# Altium PCB LS1.PcbDoc
Units mil, origin at the board's own origin, x right, y up, seen from the top; angles counter-clockwise.
Board outline 3000 x 3550 mil, 4 copper layers (Top Layer, Internal Plane 1, Internal Plane 2, Bottom Layer), stack 30.634 mil thick; 89 components, 61 nets, 367 pads, 57 vias.
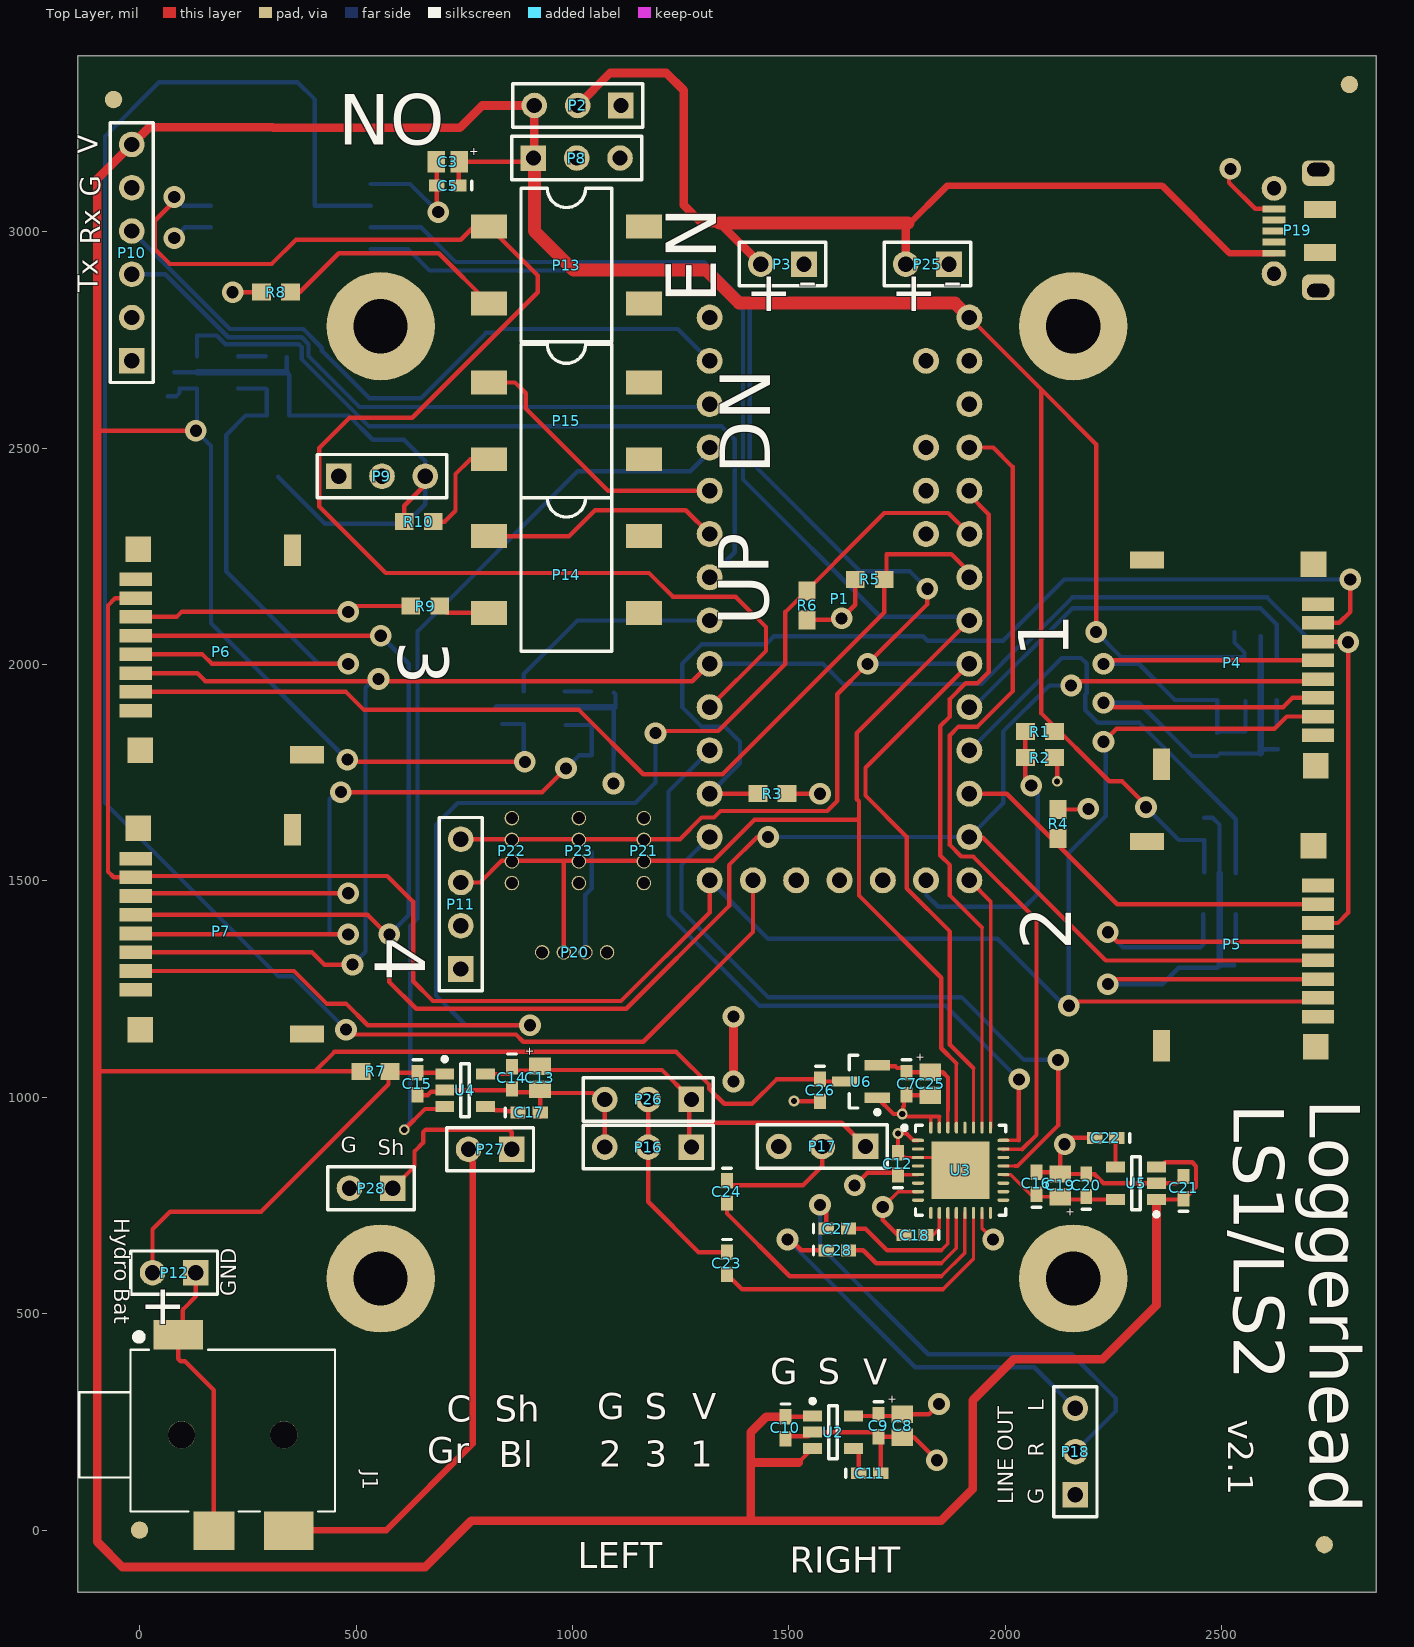
[diagram p0: Top Layer view]
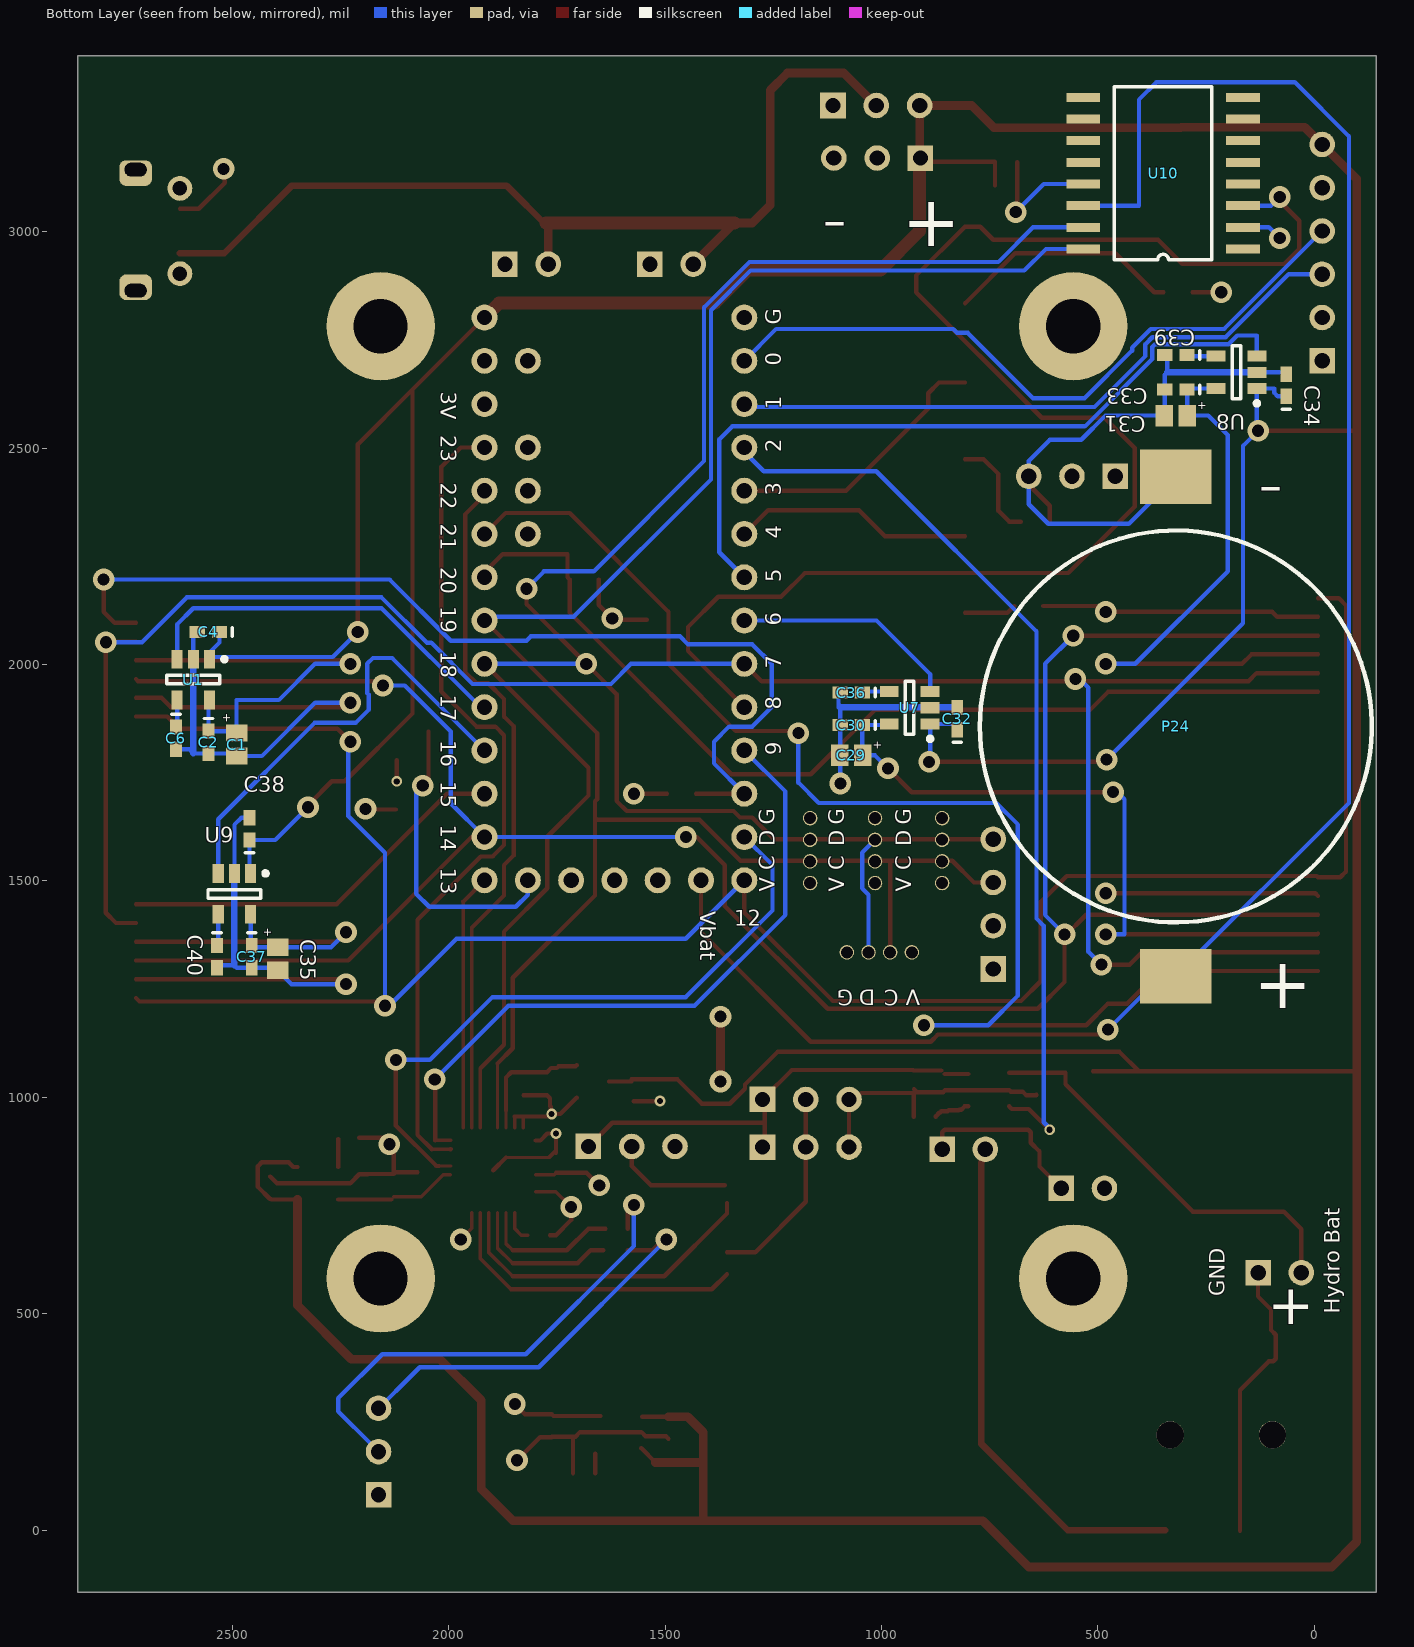
[diagram p1: Bottom Layer view, seen from below]
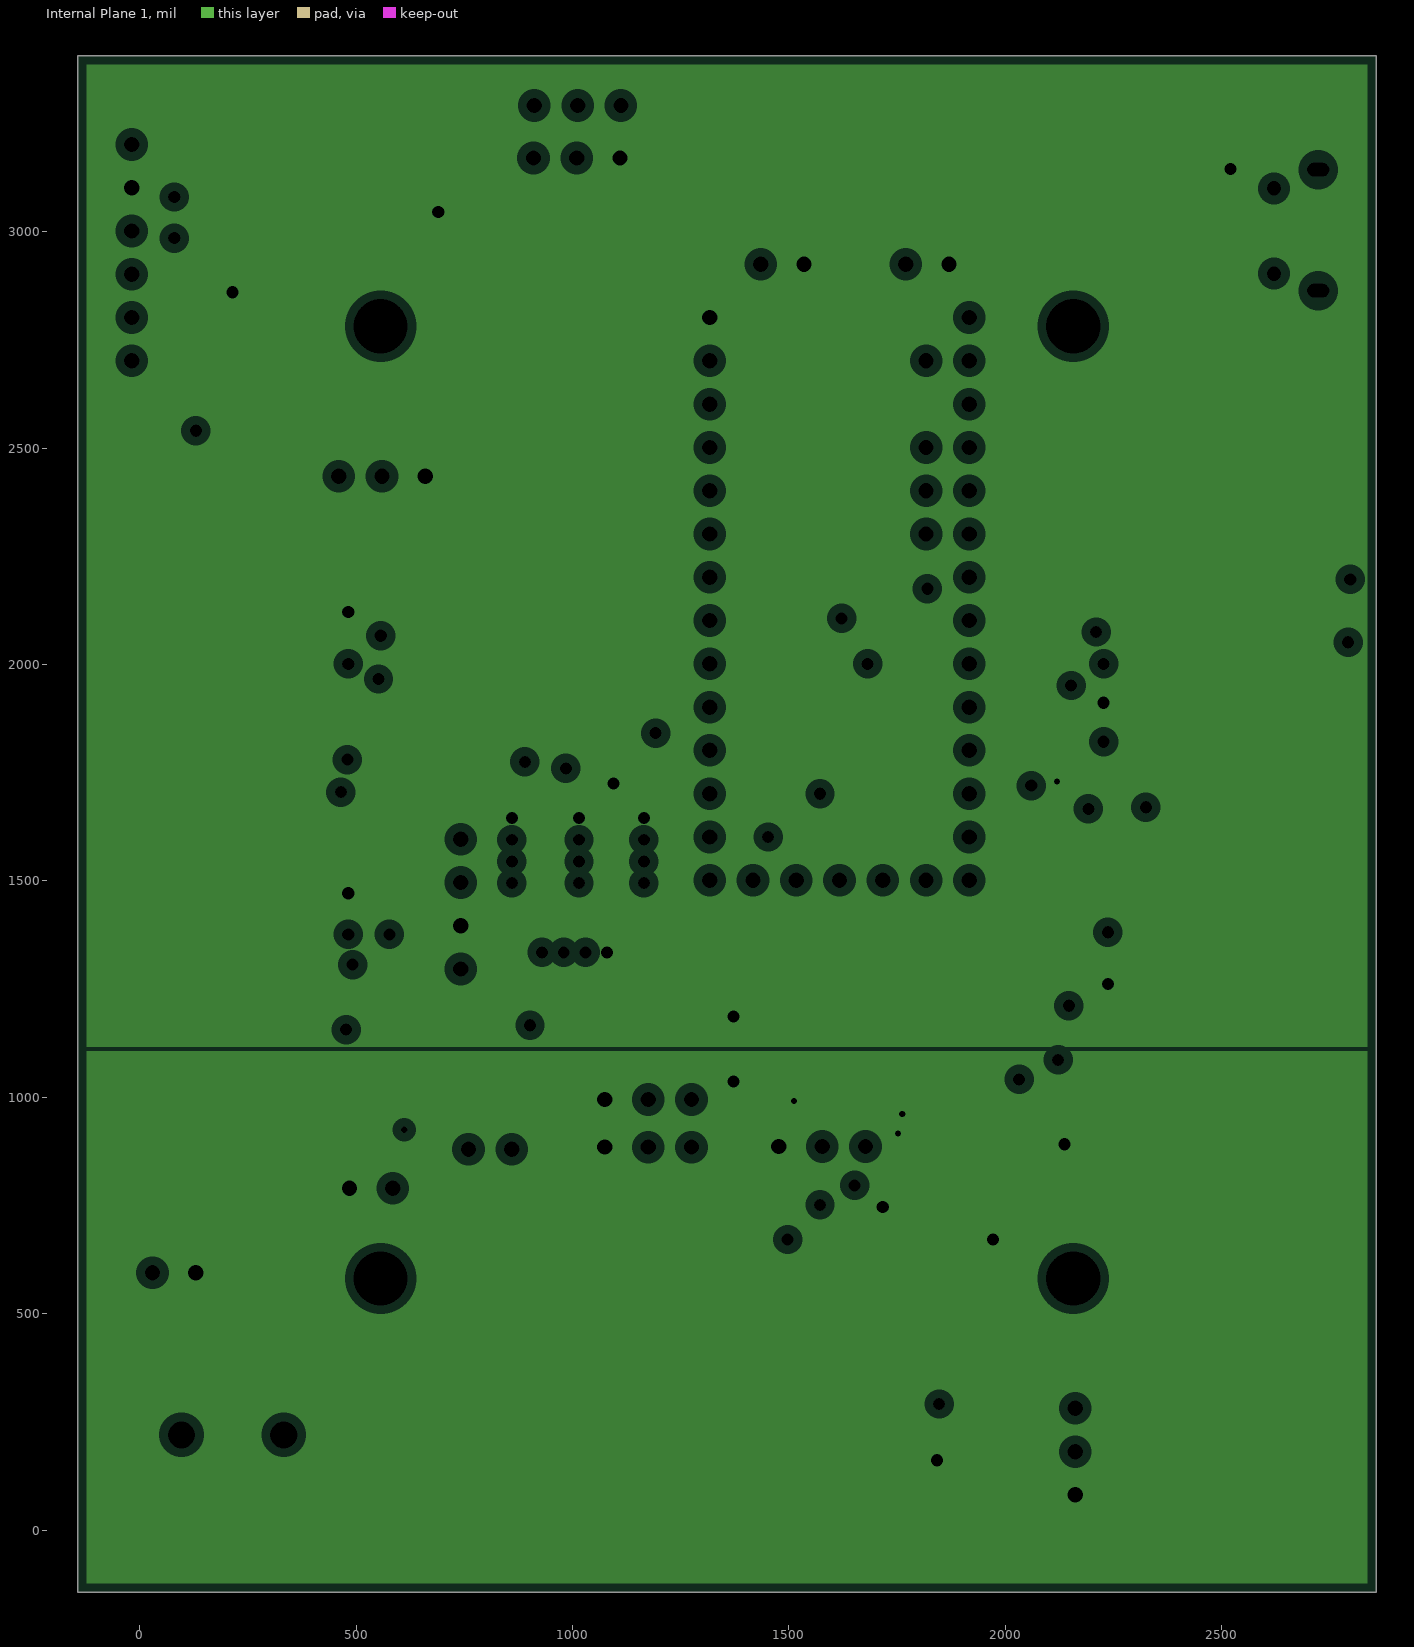
[diagram p2: Internal Plane 1, clearances drawn from the general rule]
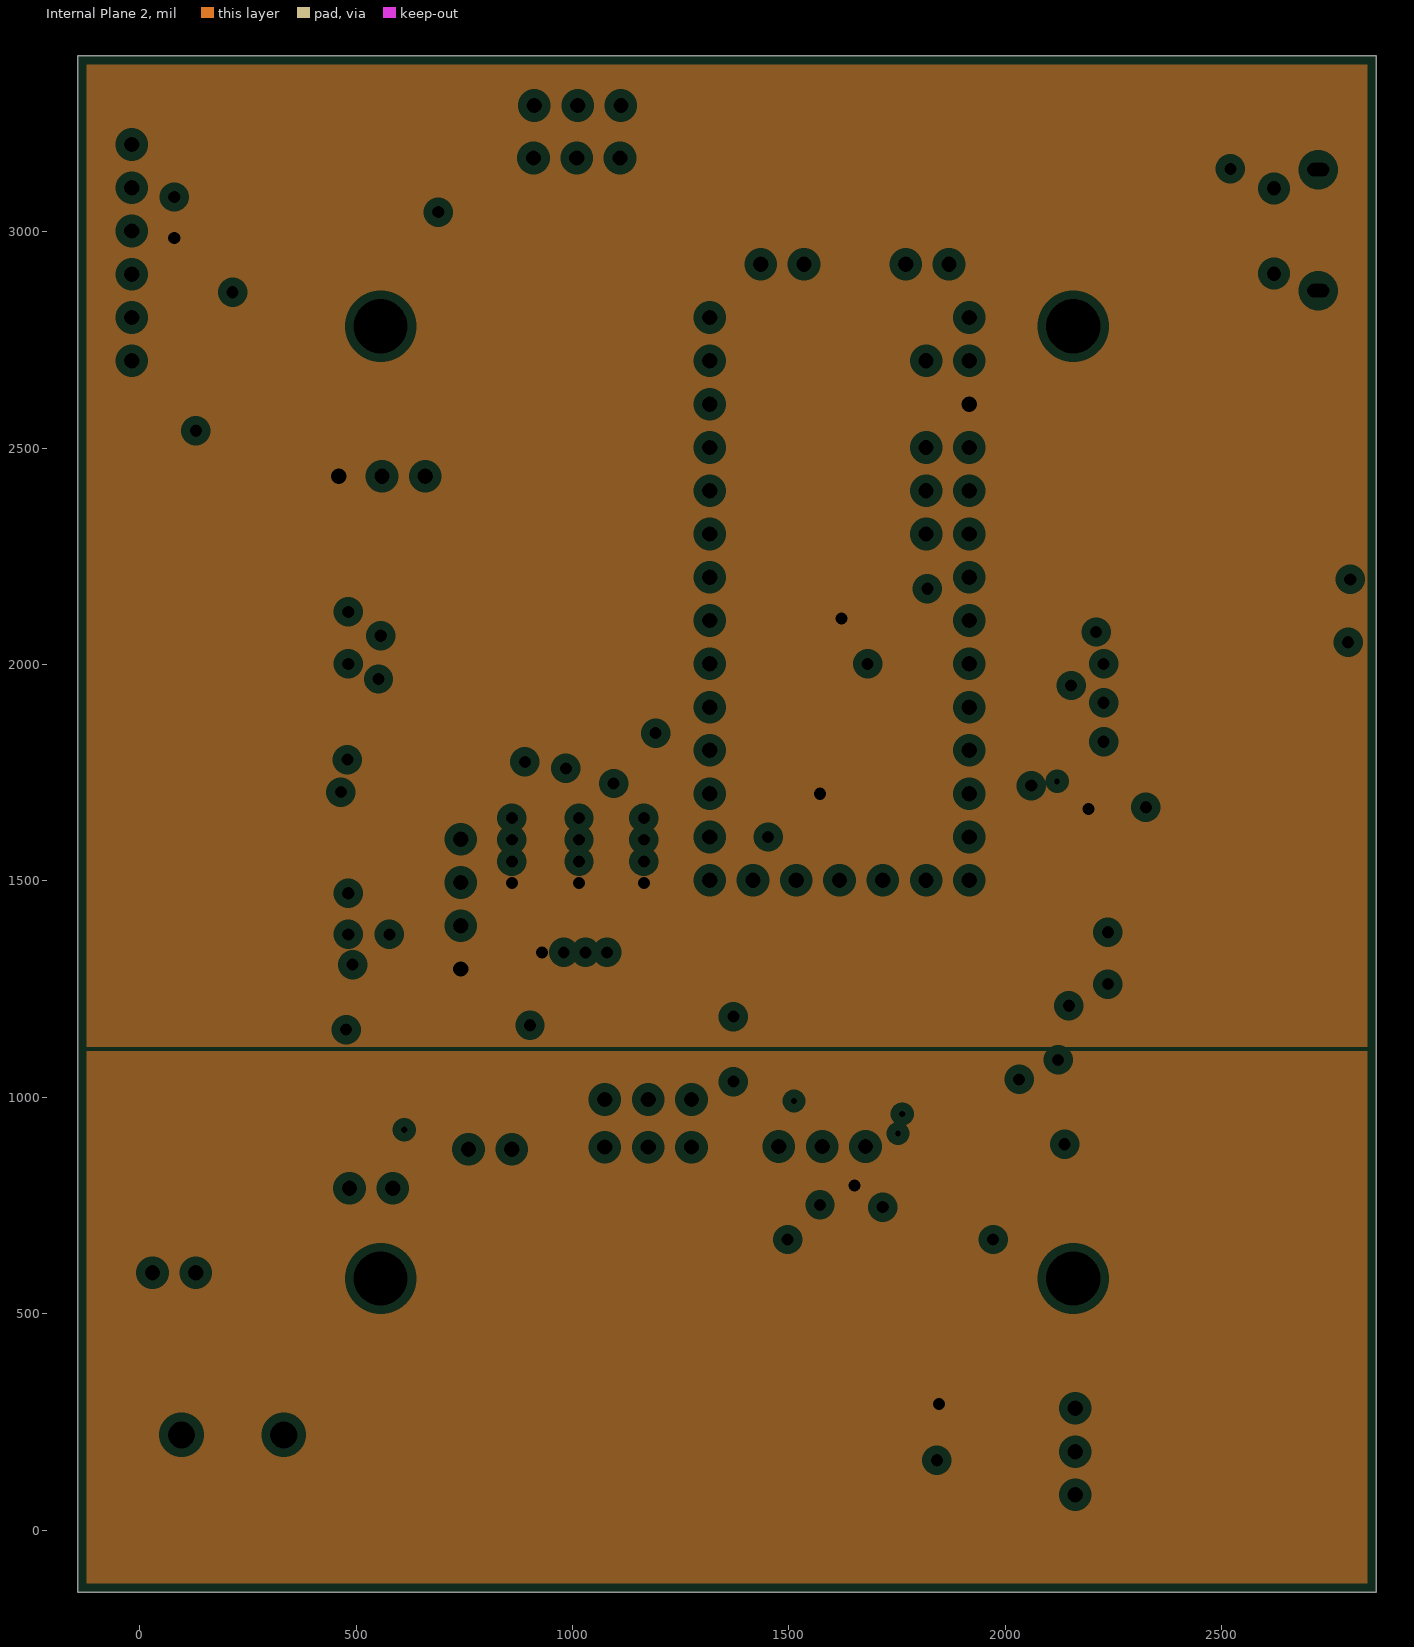
[diagram p3: Internal Plane 2, clearances drawn from the general rule]

## Layer stack, top to bottom
Top Solder: solder mask 0.4, Solder Resist, Dk 3.5
Top Layer: signal copper 1.4
Dielectric 1: core 10, FR-4, Dk 4.2
Internal Plane 1: plane copper 1.417, net (Multiple Nets)
Dielectric 3: prepreg 5, Dk 4.2
Internal Plane 2: plane copper 1.417, net (Multiple Nets)
Dielectric 2: core 10, Dk 4.2
Bottom Layer: signal copper 1.4
Bottom Solder: solder mask 0.4, Solder Resist, Dk 3.5

## Board outline
-142.95,-143.58 -142.95,3406.42 2857.05,3406.42 2857.05,-143.58

## Design rules (kind name [scope] priority, off if disabled: settings)
Clearance [All] p1: gap=6 ignorepadtopadclearanceinfootprint=FALSE except(0: Arc-Hole Track-Hole SMDPad-Hole THPad-Hole Via-Hole Fill-Hole Poly-Hole Region-Hole Text-Hole)
PlaneClearance [All] p1: clearance=20
PlaneConnect [All] p1: planeconnectstyle=Relief reliefexpansion=20 reliefentries=4 reliefconductorwidth=10 reliefairgap=10
PolygonConnect [All] p1: connectstyle=Relief reliefconductorwidth=10 reliefentries=4 polygonreliefangle="90 Angle" airgapwidth=10
RoutingVias [All] p1: holewidth=28 width=50 viastyle="Through Hole" minholewidth=28 minwidth=50 maxholewidth=28 maxwidth=50
SolderMaskExpansion [All] p1: expansion=4 istentingtop=FALSE
Width [All] p1: maxlimit=100 minlimit=6 preferedwidth=10
28 further rules are at their usual default settings.

## Classes and differential pairs
component class LS1: C1 C2 C3 C4 C5 C6 C29 C30 C31 C32 C33 C34 C35 C36 C37 C38 C39 C40 P1 P2 P3 P4 P5 P6 P7 P8 P9 P10 P11 P13 P14 P15 P19 P20 P21 P22 P23 P24 P25 R1 R2 R3 R4 R5 R6 R8 R9 R10 U1 U7 U8 U9 U10
component class LS1_audio: C7 C8 C9 C10 C11 C12 C13 C14 C15 C16 C17 C18 C19 C20 C21 C22 C23 C24 C25 C26 C27 C28 J1 P12 P16 P17 P18 P26 P27 P28 R7 U2 U3 U4 U5 U6

## Components (designator, comment, footprint, x,y, rotation, side; value= is the part's Value field where it differs from the comment)
C1 "10uF" Tant0805 2490,1815 r90 bottom
C2 "0.1uF" 0402 2555,1820 r270 bottom
C3 "10uF" Tant0805 712.05,3161.42 r0 top
C4 "1uF" 0402 2555,2075 r0 bottom value=0.1uF
C5 "0.1uF" 0402 712.05,3106.42 r180 top
C6 "0.01uF" 0402 2630,1830 r270 bottom value=0.1uF
C7 "0.1uF" 0402 1772.05,1031.42 r270 top
C8 "10uF" Tant0805 1762.05,241.42 r90 top
C9 "0.1uF" 0402 1707.05,241.42 r270 top
C10 "1uF" 0402 1492.05,236.42 r270 top value=0.1uF
C11 "0.01uF" 0402 1687.05,131.42 r0 top value=0.1uF
C12 "0.1uF" 0402 1752.05,846.42 r90 top
C13 "10uF" Tant0805 925,1045 r90 top
C14 "0.1uF" 0402 860,1045 r270 top
C15 "1uF" 0402 642.05,1031.42 r270 top value=0.1uF
C16 "0.1uF" 0402 2072.05,801.42 r90 top
C17 "0.01uF" 0402 900,965 r0 top value=0.1uF
C18 "0.1uF" 0402 1791.46,681.42 r180 top
C19 "10uF" Tant0805 2127.05,796.42 r270 top
C20 "0.1uF" 0402 2187.05,796.42 r90 top
C21 "1uF" 0402 2412.05,791.42 r90 top value=0.1uF
C22 "0.01uF" 0402 2232.05,906.42 r180 top value=0.1uF
C23 "1.0uF" 0402 1357.05,616.42 r270 top value=0.1uF
C24 "1.0uF" 0402 1357.05,781.42 r270 top value=0.1uF
C25 "10uF" Tant0805 1827.05,1031.42 r90 top
C26 "1uF" 0402 1572.05,1016.42 r270 top value=0.1uF
C27 "1.0uF" 0402 1612.05,696.42 r0 top value=0.1uF
C28 "1.0uF" 0402 1612.05,646.42 r0 top value=0.1uF
C29 "10uF" Tant0805 1070,1790 r180 bottom
C30 "0.1uF" 0402 1070,1860 r0 bottom
C31 "10uF" Tant0805 320,2575 r180 bottom
C32 "1uF" 0402 825,1875 r90 bottom value=0.1uF
C33 "0.1uF" 0402 320,2635 r0 bottom
C34 "1uF" 0402 65,2645 r90 bottom value=0.1uF
C35 "10uF" Tant0805 2395,1320 r90 bottom
C36 "0.01uF" 0402 1070,1935 r0 bottom value=0.1uF
C37 "0.1uF" 0402 2455,1325 r270 bottom
C38 "1uF" 0402 2460,1620 r90 bottom value=0.1uF
C39 "0.01uF" 0402 320,2715 r0 bottom value=0.1uF
C40 "0.01uF" 0402 2535,1325 r270 bottom value=0.1uF
J1 "MJ1-3510-SMT" CUI_MJ1-3510-SMT 215,220 r0 top
P1 "Teensy3.x" Teensy3.x 1817.05,2701.42 r180 top
P2 "switch" HDR1X3 1112.05,3291.42 r180 top
P3 "Header 2" HDR1X2 1535,2925 r180 top
P4 "microSD Hirose" "DM3D microSD" 2597.05,2076.42 r180 top
P5 "microSD Hirose" "DM3D microSD" 2597.05,1426.42 r180 top
P6 "microSD Hirose" "DM3D microSD" 117.05,1956.42 r0 top
P7 "microSD Hirose" "DM3D microSD" 117.05,1311.42 r0 top
P8 "BIG CAP 1000 uF" HDR1X3 910,3170 r0 top
P9 "BIG CAP 1000 uF" HDR1X3 460,2435 r0 top
P10 "Header 6" HDR1X6 -17.95,2701.42 r90 top
P11 "Header 4" HDR1X4 742.05,1296.42 r90 top
P12 "Header 2" HDR1X2 130,595 r180 top
P13 "pushbutton" SOP4 807.05,3011.42 r0 top
P14 "pushbutton" SOP4 807.05,2296.42 r0 top
P15 "pushbutton" SOP4 807.05,2651.42 r0 top
P16 "HYDROPHONE" HDR1X3 1275,885 r180 top
P17 "HYDROPHONE" HDR1X3 1677.05,886.42 r180 top
P18 "Header 3" HDR1X3 2162,81.42 r90 top
P19 "microUSB" microUSB-B 2672.05,3001.42 r90 top
P20 "1x4 1.27mm" "Header1x4 1.27mm" 930,1335 r0 top
P21 "1x4 1.27mm" "Header1x4 1.27mm" 1165,1495 r90 top
P22 "1x4 1.27mm" "Header1x4 1.27mm" 860,1495 r90 top
P23 "1x4 1.27mm" "Header1x4 1.27mm" 1015,1495 r90 top
P24 "CoinCellHolder" CoinCellHolder 320,1280 r90 bottom
P25 "Header 2" HDR1X2 1870,2925 r180 top
P26 "HYDROPHONE_MON" HDR1X3 1275,995 r180 top
P27 "Header 2" HDR1X2 860,880 r180 top
P28 "Header 2" HDR1X2 585,790 r180 top
R1 "100k" 3-0603 2080,1845 r0 top
R2 "100k" 3-0603 2080,1785 r180 top
R3 "10k" 3-0603 1462.05,1701.42 r180 top
R4 "10k" 3-0603 2122.05,1631.42 r270 top
R5 "10k" 3-0603 1687.05,2196.42 r0 top
R6 "10k" 3-0603 1542.05,2136.42 r90 top
R7 "0X" 3-0603 545,1060 r0 top
R8 "10k" 3-0603 315,2860 r180 top
R9 "10k" 3-0603 660,2135 r180 top
R10 "10k" 3-0603 645,2330 r180 top
U1 "LP3985IM5-3.3" MF05A_N 2590,1965 r270 bottom
U2 "LP3985IM5-3.3" MF05A_N 1602.05,226.42 r0 top
U3 "SGTL5000" QFN32 1897.05,831.42 r0 top
U4 "LP3985IM5-3.3" MF05A_N 752.05,1016.42 r0 top
U5 "LP3985IM5-3.3" MF05A_N 2302.05,801.42 r180 top
U6 "MCP1700T-1802E/TT" SOT-23-TT3_N 1667.05,1036.42 r180 top
U7 "LP3985IM5-3.3" MF05A_N 935,1900 r0 bottom
U8 "LP3985IM5-3.3" MF05A_N 180,2675 r0 bottom
U9 "LP3985IM5-3.3" MF05A_N 2495,1470 r270 bottom
U10 "DS3231" DS3231 165,2960 r0 bottom

## Footprints (in the part's own frame and the unit in brackets; to place one, negate y for a bottom-side part, rotate by r counter-clockwise, add the part's x,y. Pads: shape width x height; smd on the part's side, far side on the other; paste and mask are expansions set on the pad)
3-0603 [mm] "Chip Resistor; Body 1.6 x 0.9 mm (LxW typ)"
  rect 1.1x1 smd: 1(-0.85,0) 2(0.85,0)
0402 [mm] "Chip Capacitor; Body 1.0 x 0.5 mm (LxW typ)"
  rect 0.9x0.7 smd: 1(-0.65,0) 2(0.65,0)
  silkscreen extent -1.4,-0.25 -1.4,0.25
CoinCellHolder [mm] "MPD BU2032SM-BT-GTR"
  rect 3.2x4.2 smd: 1(0,0) 2(29.3,0)
  silkscreen extent 3.15,-11.5 26.15,11.5
CUI_MJ1-3510-SMT [mm]
  rect 2.9x1.75 smd: 1(-3.2,5.875)
  rect 2.9x2.25 smd: 2(3.3,-5.625)
  rect 2.4x2.25 smd: 3(-1.1,-5.625)
  round 1.6 hole 1.6 unplated: ""(-3,0) ""(3,0)
  silkscreen extent -9,-4.5 6,5.95
"DM3D microSD" [mm] "MICROSD_HIROSE Push-Pull"
  rect 1.5x1.5 smd: 0(-3.048,7.874) 0(-2.921,-3.937)
  rect 1x1.85 smd: 0(6,7.8)
  rect 2x1 smd: 0(6.85,-4.191)
  rect 1.9x0.8 smd: 1(-3.188,-1.601) 2(-3.188,-0.501) 3(-3.188,0.599) 4(-3.188,1.699) 5(-3.188,2.799) 6(-3.188,3.899) 7(-3.188,4.999) 8(-3.188,6.099)
  body extent -3.65,-4.45 7.8,7.5, height 1.55
DS3231 [mm]
  rect 1.98x0.53 smd: 1(0,0) 2(0,-1.27) 3(0,-2.54) 4(0,-3.81) 5(0,-5.08) 6(0,-6.35) 7(0,-7.62) 8(0,-8.89) 9(9.37,-8.89) 10(9.37,-7.62) 11(9.37,-6.35) 12(9.37,-5.08) 13(9.37,-3.81) 14(9.37,-2.54) 15(9.37,-1.27) 16(9.37,0)
  silkscreen extent 1.83,-9.53 7.54,0.64
HDR1X2 [mm] "Connector; Header; 2 Position"
  rect 1.5x1.5 hole 0.9: 1(0,0)
  round 1.5 hole 0.9: 2(2.54,0)
  silkscreen extent -1.27,-1.27 3.81,1.27
HDR1X3 [mm] "Connector; Header; 3 Position"
  rect 1.5x1.5 hole 0.9: 1(0,0)
  round 1.5 hole 0.9: 2(2.54,0) 3(5.08,0)
  silkscreen extent -1.27,-1.27 6.35,1.27
HDR1X4 [mm] "Connector; Header; 4 Position"
  rect 1.5x1.5 hole 0.9: 1(0,0)
  round 1.5 hole 0.9: 2(2.54,0) 3(5.08,0) 4(7.62,0)
  silkscreen extent -1.27,-1.27 8.89,1.27
HDR1X6 [mm] "Connector; Header; 6 Position"
  rect 1.5x1.5 hole 0.9: 1(0,0)
  round 1.5 hole 0.9: 2(2.54,0) 3(5.08,0) 4(7.62,0) 5(10.16,0) 6(12.7,0)
  silkscreen extent -1.27,-1.27 13.97,1.27
"Header1x4 1.27mm" [mm]
  round 0.85 hole 0.7: 1(0,0) 2(1.27,0) 3(2.54,0) 4(3.81,0)
MF05A_N [mm] "SOT23, 5-Leads, Body 2.9x1.6mm, Pitch 0.95mm, Lead Span 2.8mm, IPC Medium Density"
  rect 1.1x0.65 smd: 1(-1.2,0.95) 2(-1.2,0) 3(-1.2,-0.95) 4(1.2,-0.95) 5(1.2,0.95)
  silkscreen extent -1.32,-1.55 0.25,1.95, body extent -0.9,-1.55 0.9,1.55, height 1.19
microUSB-B [mm]
  rect 0.4x1.35 smd: 1(-1.3,1.3) 2(-0.65,1.3) 3(0,1.3) 4(0.65,1.3) 5(1.3,1.3)
  rrect50% 1.5x1.9 hole 0.8 slot 1.3 at 90 deg copper offset 0.2,0: ""(-3.5,-1.3)
  round 1.45 hole 0.85: ""(-2.5,1.3) ""(2.5,1.3)
  rect 1x1.9 smd: ""(-1.25,-1.4) ""(1.25,-1.4)
  rrect50% 1.5x1.9 hole 0.8 slot 1.3 at 90 deg copper offset -0.2,0: ""(3.6,-1.3)
  body extent -4.1,-4.07 4.1,1.36, height 2.68
QFN32 [mm]
  oval 0.7x0.2 smd: 1(-2.5,1.75) 2(-2.5,1.25) 3(-2.5,0.75) 4(-2.5,0.25) 5(-2.5,-0.25) 6(-2.5,-0.75) 7(-2.5,-1.25) 8(-2.5,-1.75) 17(2.5,-1.75) 18(2.5,-1.25) 19(2.5,-0.75) 20(2.5,-0.25) 21(2.5,0.25) 22(2.5,0.75) 23(2.5,1.25) 24(2.5,1.75)
  oval 0.2x0.7 smd: 9(-1.75,-2.5) 10(-1.25,-2.5) 11(-0.75,-2.5) 12(-0.25,-2.5) 13(0.25,-2.5) 14(0.75,-2.5) 15(1.25,-2.5) 16(1.75,-2.5) 25(1.75,2.5) 26(1.25,2.5) 27(0.75,2.5) 28(0.25,2.5) 29(-0.25,2.5) 30(-0.75,2.5) 31(-1.25,2.5) 32(-1.75,2.5)
  rect 3.4x3.4 smd paste-1.2: 33(0,0)
  silkscreen extent -3.42,-2.65 2.65,2.65, body extent -2.5,-2.5 2.5,2.5, height 1
SOP4 [mm]
  rect 2.1x1.4 smd: 1(0,0) 2(0,-4.5) 3(9.1,-4.5) 4(9.1,0)
  silkscreen extent 1.89,-6.75 7.21,2.25
SOT-23-TT3_N [mm] "SOT23, 3-Leads, Body 2.9x1.3mm, Pitch 0.95mm, Lead Span 2.4mm, IPC Medium Density"
  rect 1.5x0.6 smd: 1(-0.95,0.95) 2(-0.95,-0.95) 3(0.95,0)
  silkscreen extent -1.07,-1.55 0.7,1.92, body extent -0.7,-1.52 0.7,1.53, height 1.12
Tant0805 [mil]
  rect 40x50 smd: 1(-26.5,0) 2(26.5,0)
Teensy3.x [mil]
  round 60 hole 35.43: 0(500,0) 1(500,100) 2(500,200) 3(500,300) 3.3V(-100,100) 3.3V2(300,1200) 4(500,400) 5(500,500) 6(500,600) 7(500,700) 8(500,800) 9(500,900) 10(500,1000) 11(500,1100) 12(500,1200) 13(-100,1200) 14(-100,1100) 15(-100,1000) 16(-100,900) 17(-100,800) 18(-100,700) 19(-100,600) 20(-100,500) 21(-100,400) 22(-100,300) 23(-100,200) A10(0,300) A11(0,400) A14(0,1200) AGND(-100,0) AREF(0,200) GND(500,-100) GND2(200,1200) PGM(100,1200) VBat(400,1200) Vin(-100,-100) VUSB(0,0)

## Part data
C1 C3 C8 C13 C19 C25 C29 C31 C35: library part Tant0805
C2 C4 C5 C6 C7 C9 C10 C11 C12 C14 C15 C16 C17 C18 C20 C21 C22 C23 C24 C26 C27 C28 C30 C32 C33 C34 C36 C37 C38 C39 C40: library part C0402, "Ceramic Chip Capacitor - Standard", PackageDocument=Mar-2001, Code_IPC="1005 [0402]", Code_JEITA=0402, ComponentLink1Description="Manufacturer Link", ComponentLink1URL=http://www.kemet.com/, ComponentLink2Description=Datasheet, ComponentLink2URL=http://www.kemet.com/kemet/web/homepage/kechome.nsf/vapubfilesname/F3102TA.pdf/$file/F3102TA.pdf, DatasheetDocument=Mar-2001, LatestRevisionDate=19-Mar-2004, LatestRevisionNote="Silkscreen size reduced.", Note="Footprint corresponds to dimensions for bulk cassette packaging. This case size has tightened tolerances.", PackageReference=0402, Published=17-Jul-2002, Publisher="Altium Limited"
J1: "3.5 mm, Mono, Right Angle, Surface Mount (SMT), Audio Jack Connector", Package=None, Availability=Unavailable, MF="{'manufacturer': u'CUI'}", MP=MJ1-3510-SMT, Price=None
P2 P8 P9 P16 P17 P26: library part "Header 3", "Header, 3-Pin", LatestRevisionDate=17-Jul-2002, LatestRevisionNote="Re-released for DXP Platform.", Publisher="Altium Limited"
P3 P12 P25 P27 P28: "Header, 2-Pin", LatestRevisionDate=17-Jul-2002, LatestRevisionNote="Re-released for DXP Platform.", Publisher="Altium Limited"
P4 P5 P6 P7: Supplier Part Number 1=HR1941DKR-ND, Supplier 1=Digi-Key
P10: "Header, 6-Pin", LatestRevisionDate=17-Jul-2002, LatestRevisionNote="Re-released for DXP Platform.", Publisher="Altium Limited"
P11: "Header, 4-Pin", LatestRevisionDate=17-Jul-2002, LatestRevisionNote="Re-released for DXP Platform.", Publisher="Altium Limited"
P13 P14 P15: Supplier Part Number 1=450-1757-2-ND, Supplier 1=Digi-Key
P18: "Header, 3-Pin", LatestRevisionDate=17-Jul-2002, LatestRevisionNote="Re-released for DXP Platform.", Publisher="Altium Limited"
P19: library part microUSB-B, Supplier Part Number 1=WM1399TR-ND, Supplier 1=Digi-Key
P20 P21 P22 P23: library part "Header 1x4 1.27mm"
P24: Supplier Part Number 1=BU2032SM-BT-GCT-ND, Supplier 1=Digi-Key
R1 R2 R3 R4 R5 R6 R7 R8 R9 R10: library part ERJ3RK, "Precision Thick Film Chip Resistor, 10 Ohm to 1M Ohm Range, 1% and 0.5% Tolerance, 0603 Size, 0.063 W", PackageDocument=Mar-2003, Code_IPC="1608 [0603]", ComponentLink1Description="Manufacturer Link", ComponentLink1URL=http://www.panasonic.com/industrial/components/resistive_products.htm, ComponentLink2Description=Datasheet, ComponentLink2URL=http://www.panasonic.com/industrial/components/pdf/AOA0000CE2.pdf, LatestRevisionDate=19-Mar-2004, LatestRevisionNote="Silkscreen size reduced.", PackageReference=3-0603, Published=17-Dec-2003, Publisher="Altium Limited"
U1 U2 U4 U5 U7 U8 U9: "Micropower, 150mA Low-Noise Ultra Low-Dropout CMOS Voltage Regulator", DigiKeyPartNumber=LP3985IM5-3.3CT-ND, Manufacturer="National Semiconductor", PackageTopMarking=LDQB*XTT, PowerWise=N, ComponentLink1Description="LP3985 Datasheet", ComponentLink1URL=http://www.national.com/ds/LP/LP3985.pdf, ComponentLink2Description="LP3985 Web Page", ComponentLink2URL=http://www.national.com/pf/LP/LP3985.html, ComponentLink3Description="MF05A Package Page", ComponentLink3URL=http://www.national.com/packaging/folders/mf05a.html, CompType="LDO IC", DatasheetVersion=Aug-2005, PackageDescription="Molded SOT-23, .115 x .063 x .040 in Body, 5 Lead, .0375 in Pitch", PackageReference=MF05A, PackageVersion="revD, Aug-2008", PartNumber=LP3985IM5-3.3, PinCount=5, Published=4-Dec-2008, Publisher="Altium Limited", RoHS=O
U6: "Low Quiescent Current LDO, 3-Pin SOT-23, Extended Temperature, Tape and Reel", Manufacturer=Microchip, Supplier Part Number 1=MCP1700T1802ETTTR-ND, Code_IPC=SOT23-3, ComponentLink1Description="Manufacturer URL", ComponentLink1URL=http://www.microchip.com/, ComponentLink2Description=Datasheet, ComponentLink2URL=http://ww1.microchip.com/downloads/en/DeviceDoc/21826b.pdf, ComponentLink3Description="Package Specification", ComponentLink3URL=http://www.microchip.com/stellent/groups/techpub_sg/documents/packagingspec/en012702.pdf, DatasheetVersion="revB, Feb-2007", Mounting Technology="Surface Mount", PackageDescription="3-Lead Plastic Small Outline Transistor (TT) [SOT-23]", PackageReference=SOT-23-TT3, PackageVersion="revBB, Aug-2009", PartNumber=MCP1700T-1802E/TT, Supplier 1=Digi-Key, Supplier 2=Digi-Key, Supplier 3=Digi-Key, Supplier 4=Farnell, Supplier 5=Farnell, Supplier 6=Newark, Supplier 7=Mouser, Supplier Part Number 2=MCP1700T1802ETTCT-ND, Supplier Part Number 3=MCP1700T1802ETTDKR-ND, Supplier Part Number 4=1296591RL, Supplier Part Number 5=1296591, Supplier Part Number 6=84R5175, Supplier Part Number 7=579-MCP1700T1802E/TT
U10: Supplier Part Number 1=DS3231S#-ND, Supplier 1=Digi-Key

## Free pads (board coordinates)
  round 40 smd paste-20 mask+5: 0(-60,3305) 0(0,0) 0(2737.05,-33.58) 0(2795,3340)
  round 250 hole 125: 0(557.05,581.42) 0(557.05,2781.42) 0(2157.05,581.42) 0(2157.05,2781.42)

## Via types
v1: diameter 50, hole 28, Top Layer to Bottom Layer, 52 vias
v2: diameter 25, hole 14, Top Layer to Bottom Layer, 5 vias

## Nets (pads, with @x,y where several pads share a name; then routed paths per layer and width w, separated by ;. In a path a pad name is that pad's centre, name@x,y a point inside that pad or via, vN(x,y) a via of type N, cw(c..) or ccw(c..) an arc to the next point about the centre after c; other vN are vias at no path point)
AGND: C7.2 C8.1 C9.2 C10.2 C11.2 C12.2 C13.1 C14.2 C15.2 C16.2 C17.2 C18.2 C19.1 C20.2 C21.2 C22.2 C25.1 C26.2 J1.1 J1.3 P12.1 P16.3 P17.3 P18.1 P26.3 P28.2 U2.2 U3.1 U3.3 U3.7 U3.15 U3.31 U3.32 U3.33 U4.2 U5.2 U6.1 | length 3102.5
  Top Layer w8: v1@1723.27,752.64 1752.83,782.2 U3.7 ; C12.2@1752.05,877.01 1768.11,860.94 U3.3 U3.33@1867.52,860.94 ; U3.32 1828.15,955.31 ; U3.31 1847.83,955.63 ; U3.15 1946.26,697.2 v1(1972.05,671.42)
  Top Layer w10: P12.1@152.32,572.68 P12.1 130,540 100,510 100,462.28 J1.1 89.02,395.86 94.87,390 105,390 171.69,323.31 J1.3 ; C15.2 642.87,1005 665.86,1005 674.01,1013.15 701.53,1013.15 U4.2 853.27,1016.42 857.64,1012.05 918.55,1012.05 C13.1 ; C17.2@925.59,955 C17.2 925.59,1008.46 927.05,1009.92 1046.81,1009.92 1075,981.73 P16.3 ; C10.2 1498.03,216.81 1545.2,216.81 U2.2 1696.46,226.42 C9.2 C8.1@1761.14,215.83 ; v2@1512.64,990.83 C26.2 ; U6.1 1742.05,961.42 v2(1762.05,961.42) 1764.45,963.82 1764.45,977.91 1765.85,979.31 1765.85,997.81 1772.96,1004.92 C25.1 ; C11.2 C9.2@1712.64,210.24 ; v1@1723.27,752.64 v1(1717.05,746.42) 1717.05,716.42 1752.05,681.42 C18.2 ; C12.2 1752.05,877.01 v2(1752.05,916.42) 1772.05,916.42 1788.15,900.31 U3.1 ; C8.1 1788.55,214.92 v1(1842.05,161.42) ; v2@1767.83,955.63 1847.83,955.63 ; U3.33@1867.52,860.94 U3.33 ; C16.2 C19.1@2122.64,827.01 ; v1@2127.05,881.42 C19.1 C20.2@2186.14,822.92 ; v1@2152.05,906.42 C22.2 ; C20.2 2206.46,822.01 2227.05,801.42 U5.2 2396.46,801.42 C21.2
  other v1: 2137.05,891.42 1372.05,1036.42
  other v2: 1512.05,991.42
BATT_BACK: P1.VBat P24.1 U10.14 | length 4408.7
  Top Layer w10: v1@485,1155 495,1145 869.72,1145 886.31,1128.42 1163.42,1128.42 1417.05,1382.05 P1.VBat
  Bottom Layer w10: v1(477.05,1156.42) 353.46,1280 P24.1 -80,1680 -80,3220 45,3345 365,3345 405,3305 405,3060 U10.14
BCLK: P1.9 U3.24 | length 1563.8
  Top Layer w8: U3.24 2030.94,900.31
  Top Layer w10: 2030.94,900.31 2030.94,1040.31 v1(2032.05,1041.42)
  Bottom Layer w10: P1.9 1222.05,1706.42 1222.05,1421.42 1432.05,1211.42 1862.05,1211.42 v1(2032.05,1041.42)
CAL_PORT: J1.2 P27.2 | length 1192.4
  Top Layer w15: J1.2@344.92,0 555,0 570,0 770,200 770,849.19 768.43,850.76 768.43,881.62 P27.2@770,883.19
CS1: P1.10 P4.2 R3.2 | length 2320
  Top Layer w10: P1.10 R3.2 ; P4.2 2771.77,2096.14 2797.05,2121.42 v1(2797.05,2196.42)
  Bottom Layer w10: P1.10 1387.05,1771.42 1387.05,1821.42 1352.05,1856.42 1298.41,1856.42 1253.41,1901.42 1253.41,2001.42 1298.41,2046.42 1447.05,2046.42 1465.63,2065 1810,2065 1820,2055 1995,2055 2136.42,2196.42 v1(2797.05,2196.42)
CS2: P1.15 P5.2 R4.2 | length 911.3
  Top Layer w10: P1.15 2003.58,1701.42 2258.86,1446.14 P5.2
CS3: P1.20 P6.2 R5.2 | length 2320.2
  Top Layer w10: P6.2 476.77,1936.69 518.46,1895 1015,1895 1163.58,1746.42 1347.05,1746.42 1720.51,2119.88 R5.2 1725.51,2201.42 1725.51,2255 1875,2255 1917.05,2212.95 P1.20
CS4: P1.21 P7.2 R6.2 | length 3301.2
  Top Layer w10: P7.2 356.77,1291.69 432.05,1216.42 477.05,1216.42 527.05,1166.42 v1(902.05,1166.42) ; v1(1192.05,1841.42) 1197.05,1846.42 1337.05,1846.42 1492.05,2001.42 1492.05,2121.42 1720.32,2349.69 1720,2350 1868.46,2350 P1.21 P1.21@1917.05,2291.42
  Bottom Layer w10: v1(902.05,1166.42) 753.58,1166.42 685,1235 685,1630 735,1680 1145,1680 1192.05,1727.05 v1(1192.05,1841.42)
DGND: C1.1 C2.2 C3.1 C4.2 C5.2 C6.2 C29.1 C30.2 C31.1 C32.2 C33.2 C34.2 C35.1 C36.2 C37.2 C38.2 C39.2 C40.2 P1.GND P3.1 P4.6 P5.6 P6.6 P7.6 P8.3 P9.3 P10.5 P11.2 P19.5 P20.4 P21.4 P22.4 P23.4 P24.2 P25.1 R2.1 R8.2 R9.2 R10.2 U1.2 U7.2 U8.2 U9.2 U10.13 | length 5952.9
  Top Layer w10: P7.6 -1.97,1471.42 v1(482.05,1471.42) ; P6.6 85.55,2109.92 97.05,2121.42 v1(482.05,2121.42) ; v1(215,2860) R8.2 ; v1@495.63,2135 R9.2 ; R10.2 611.54,2366.54 660,2415 P9.3 ; v1@686.46,3048.54 C5.2 C3.1@686.46,3160.51 ; v2(2120,1730) R2.1@2120,1778.46 ; v1(2227.05,1911.42) 2237.05,1901.42 2642.05,1901.42 2663.54,1922.91 P4.6 ; v1@2248.54,1272.91 P5.6 ; v1@2517.05,3141.42 2517.05,3112.95 2577.4,3052.6 P19.5
  Bottom Layer w10: 80,2675 U8.2 ; P24.2 428.54,2325 615,2325 660,2370 P9.3 660,2470 611,2519 538.58,2519 482.58,2575 C31.1 ; 340,2675 C39.2@340,2709.41 ; C31.1@345.59,2575.91 C33.2 345.59,2669.41 ; v1@468.46,2135 v1(482.05,2121.42) ; U10.13 625,3110 v1@695,3040 ; v1@1095,1730 1095,1790.32 1095.59,1790.91 C30.2 1095.59,1900.59 ; 1095.59,1904.41 1095.59,1900.59 ; C36.2 1099.41,1931.18 1099.41,1900.59 1095.59,1900.59 ; v1(2227.05,1911.42) 2308.58,1911.42 2431.5,1788.5 C1.1 ; v1(2237.05,1261.42) 2362.92,1261.42 C35.1 2400.91,1299.41 C37.2 2489.41,1299.41 2495,1305 C40.2@2529.41,1305 ; C38.2 2479.41,1645.59 2495,1630 U9.2 ; C1.1@2495.91,1794.41 C2.2 2589.41,1794.41 ; 2590,1795 2599.41,1804.41 C6.2 ; U1.2 C4.2@2590,2065.59
  Bottom Layer w15: U8.2 340,2675 ; C32.2 1095.59,1900.59 ; 2495,1305 U9.2 ; 2590,1795 U1.2
  other v1: 1372.05,1186.42 1095,1725 690,3045 2520,3145
DN-TX: P1.3 P15.1 | length 634.1
  Top Layer w10: P15.1 867.05,2651.42 892.05,2626.42 892.05,2591.42 1082.05,2401.42 P1.3
ENT-RST: P1.8 P13.1 U10.3 | length 3427.9
  Top Layer w10: v1(80,3080) 80,3070 35,3025 35,2960 70,2925 305,2925 361.42,2981.42 742.05,2981.42 772.05,3011.42 P13.1 920,2898.46 920,2860 630,2570 485,2570 415,2500 415,2365 568.58,2211.42 1177.05,2211.42 1232.05,2156.42 1377.05,2156.42 1447.05,2086.42 1447.05,2031.42 P1.8
  Bottom Layer w10: v1(80,3080) 100,3060 U10.3
HYDRO_EN: P1.2 U4.3 | length 2136.6
  Top Layer w10: v2(611.5,925) 659.61,973.11 698.9,973.11 U4.3
  Bottom Layer w10: v2(611.5,925) 611.5,929.06 625,942.56 625,1396.09 642,1413.09 642,2076.37 1012.05,2446.42 1272.05,2446.42 1317.05,2491.42 P1.2
I2SDIN: P1.22 U3.26 | length 1592.5
  Top Layer w8: U3.26 1946.26,1392.2
  Top Layer w10: P1.22 1917.05,2391.42 1962.05,2346.42 1962.05,1982.78 1935.69,1956.42 1908.41,1956.42 1872.05,1920.06 1872.05,1879.54 1850,1857.5 1850,1558.46 1872.05,1536.42 1872.05,1466.42 1946.26,1392.2
I2SDOUT: P1.13 U3.25 | length 591.8
  Top Layer w8: U3.25 1965.94,1452.52
  Top Layer w10: P1.13 1965.94,1452.52
IN_L: C23.2 U3.14 | length 719.3
  Top Layer w8: 1856.1,556.42 1926.57,626.89 U3.14
  Top Layer w10: C23.2@1357.05,591.42 1392.05,556.42 1856.1,556.42
IN_R: C24.2 U3.13 | length 748.8
  Top Layer w8: 1852.05,586.42 1906.89,641.26 U3.13
  Top Layer w10: C24.2 1357.05,731.42 1502.05,586.42 1852.05,586.42
LRCLK: P1.23 U3.23 | length 1936.7
  Top Layer w8: U3.23@1995.79,880.31 2039.23,880.31
  Top Layer w10: P1.23 1972.05,2501.42 2017.05,2456.42 2017.05,1937.78 1935.69,1856.42 1892.05,1856.42 1872.05,1836.42 1872.05,1582.78 1898.41,1556.42 1925.69,1556.42 2072.05,1410.06 2072.05,913.13 2039.23,880.31 ; U3.23 U3.23@1995.79,880.31
MCLK: P1.11 U3.21 | length 1526.7
  Top Layer w8: U3.21 2021.89,841.26
  Top Layer w10: 2021.89,841.26 2028.46,841.26 2122.05,934.85 v1(2122.05,1086.42)
  Bottom Layer w10: P1.11 1252.05,1536.42 1252.05,1431.42 1452.05,1231.42 1898.62,1231.42 2043.62,1086.42 v1(2122.05,1086.42)
MISO: P1.12 P4.7 P5.7 P6.7 P7.7 | length 5155.5
  Top Layer w10: P6.7 -56.14,2153.23 -72.95,2136.42 -72.95,1521.42 -59.76,1508.23 P7.7 -5.28,1511.42 572.05,1511.42 632.05,1451.42 632.05,1267.95 677.58,1222.42 1112.42,1222.42 1317.05,1427.05 P1.12 ; v1@2157.05,1221.42 2714.37,1221.42 P5.7 ; v1(2227.05,1821.42) 2257.05,1851.42 2622.05,1851.42 2650.24,1879.61 P4.7
  Bottom Layer w10: P1.12 1452.05,1366.42 1982.05,1366.42 2137.05,1211.42 v1(2147.05,1211.42) 2147.05,1564.85 2232.05,1649.85 2232.05,1816.42 v1(2227.05,1821.42)
MOSI: P1.7 P4.3 P5.3 P6.3 P7.3 | length 4929.2
  Top Layer w10: P7.3 398.46,1335 427.05,1306.42 v1@487.05,1306.42 ; P6.3 133.46,1980 152.05,1961.42 1277.05,1961.42 P1.7 ; P5.3 2768.46,1402.83 2792.05,1426.42 2792.05,2046.42 2785.63,2052.83 P4.3
  Bottom Layer w10: v1(492.05,1306.42) 522.05,1336.42 522.05,1946.42 v1@542.05,1966.42 ; P1.7 1578.58,2001.42 1625,1955 1945,1955 2040,2050 2050,2050 2155,2155 2605,2155 2708.58,2051.42 v1(2792.05,2051.42)
  other v1: 552.05,1966.42
NetC6_1: C6.1 U1.4 | length 59.6
  Bottom Layer w10: C6.1@2627.4,1858.19 U1.4
NetC11_1: C11.1 U2.4 | length 45.4
  Top Layer w10: C11.1 U2.4@1661.46,176.85
NetC17_1: C17.1 U4.4 | length 85.8
  Top Layer w10: U4.4 808.15,979.02 815.94,971.22 820.58,971.22 821.8,970 845,970 847.55,967.45 861.96,967.45 865.21,964.2 866.43,964.2 874.41,956.22 C17.1@874.41,955
NetC18_1: C18.1 U3.10 | length 73.1
  Top Layer w8: C18.1 1832.05,681.42 1847.83,697.2 U3.10
NetC22_1: C22.1 U5.4 | length 64.8
  Top Layer w10: U5.4 C22.1@2254.8,903.58
NetC23_1: C23.1 P16.2 P26.2 | length 466.8
  Top Layer w10: P26.2 P16.2 1175,758.46 1291.46,642.01 C23.1
NetC24_1: C24.1 P17.2 | length 278.4
  Top Layer w10: C24.1@1362.05,797.01 1532.64,797.01 1577.05,841.42 P17.2
NetC27_2: C27.2 U3.11 | length 328.1
  Top Layer w8: 1852.05,646.42 1867.52,661.89 U3.11
  Top Layer w10: C27.2 1677.05,696.42 1727.05,646.42 1852.05,646.42
NetC28_2: C28.2 U3.12 | length 353
  Top Layer w8: 1852.05,616.42 1887.2,651.57 U3.12
  Top Layer w10: C28.2@1642.64,646.42 1672.05,646.42 1702.05,616.42 1852.05,616.42
NetC36_1: C36.1 U7.4 | length 59.8
  Bottom Layer w10: U7.4 C36.1@1042.01,1937.4
NetC39_1: C39.1 U8.4 | length 64.6
  Bottom Layer w10: U8.4 C39.1@291.81,2712.4
NetC40_1: C40.1 U9.4 | length 69.6
  Bottom Layer w10: C40.1@2532.4,1353.19 U9.4
NetP13_2: P13.2 R8.1 | length 543.8
  Top Layer w10: R8.1 370,2860 460,2950 691.3,2950 P13.2
NetP14_2: P14.2 R9.1 | length 120.1
  Top Layer w10: R9.1 709.21,2119.25 P14.2
NetP15_2: P15.2 R10.1 | length 238.1
  Top Layer w10: R10.1 705,2330 730,2355 730,2440 764.25,2474.25 P15.2
OUT_L: C27.1 P18.2 | length 1101.4
  Top Layer w10: C27.1 v1@1586.46,737.01
  Bottom Layer w10: v1(1572.05,751.42) 1572.05,656.42 1822.05,406.42 2153.58,406.42 2255,305 2255,274.42 P18.2@2179.52,198.94
OUT_R: C28.1 P18.3 | length 951
  Top Layer w10: v1(1497.05,671.42) 1503.62,671.42 1528.62,646.42 C28.1
  Bottom Layer w10: v1(1497.05,671.42) 1792.05,376.42 2067,376.42 P18.3@2179.52,263.89
POW1: P1.17 U1.3 | length 900.9
  Bottom Layer w10: P1.17 1926.42,1901.42 2155,2130 2590,2130 2627.4,2092.6 U1.3
POW2: P1.16 U9.3 | length 1050.4
  Bottom Layer w10: P1.16 2130.63,2015 2175,2015 2188.05,2001.95 2188.05,1933.46 2185,1930.41 2185,1895 2215,1865 2310,1865 2532.4,1642.6 U9.3
POW3: P1.5 U8.3 | length 1747.9
  Bottom Layer w10: U8.3 132.76,2760 178.21,2760 198.43,2739.78 367.86,2739.78 374.31,2733.34 374.31,2705.9 530.21,2550 1345,2550 1375,2520 1375,2259.37 P1.5
POW4: P1.6 U7.3 | length 520.9
  Bottom Layer w10: U7.3 887.76,1977.76 1011.42,2101.42 P1.6
RX: P1.0 P10.4 | length 1596.6
  Bottom Layer w10: P10.4 208.46,2775 377.9,2775 421.05,2731.85 421.05,2725.08 531.13,2615 650,2615 771.28,2736.28 800,2765 800,2766.33 825.7,2766.33 834.38,2775 1243.46,2775 P1.0
SCK: P1.14 P4.5 P5.5 P6.5 P7.5 | length 5560.7
  Top Layer w10: P7.5 526.85,1421.61 577.05,1371.42 577.05,1266.42 639.05,1204.42 1124.42,1204.42 1362.05,1442.05 1362.05,1536.42 1427.05,1601.42 v1(1452.05,1601.42) ; P6.5 v1@556.85,2066.61 ; P1.14 1947.05,1601.42 2232.24,1316.22 P5.5 ; v1@2162.05,1961.42 2717.76,1961.42 P4.5
  Bottom Layer w10: v1(557.05,2066.42) 622.05,2001.42 622.05,1421.42 v1(577.05,1376.42) ; v1(1452.05,1601.42) P1.14 1995,1679.37 1995,1845 2101.42,1951.42 v1(2152.05,1951.42)
SCL: P1.19 P11.3 P20.2 P21.2 P22.2 P23.2 U3.29 U10.16 | length 4532.4
  Top Layer w8: U3.29 1887.2,1077.98
  Top Layer w10: P11.3 786.42,1496.42 836.42,1546.42 980,1546.42 ; P20.2 980,1546.42 ; 1887.2,1077.98 1852.05,1113.13 1852.05,1276.42 1662.05,1466.42 1662.05,1646.42 ; P1.19 1657.05,1841.42 1657.05,1688.83 1662.05,1683.83 1662.05,1646.42 ; 980,1546.42 1325.69,1546.42 1420.69,1641.42 1657.05,1641.42 1662.05,1646.42
  Bottom Layer w10: U10.16 620,2960 670,2910 1302.37,2910 1394,2818.37 1394,2427.37 1711.37,2110 P1.19@1917.05,2110
SDA: P1.18 P11.4 P20.3 P21.3 P22.3 P23.3 U3.27 U10.15 | length 5103.5
  Top Layer w8: U3.27 1926.57,1066.89
  Top Layer w10: P11.4 1248.41,1596.42 1298.41,1646.42 1327.05,1646.42 1342.05,1661.42 1588.62,1661.42 1612.05,1684.85 1612.05,1931.42 v1@1677.05,1996.42 ; v1(1682.05,2001.42) 1820,2139.37 v1(1820,2175) ; P1.18 1677.05,1761.42 1677.05,1697.12 1772.05,1602.12 1772.05,1482.78 1872.05,1382.78 1872.05,1121.42 1926.57,1066.89
  Bottom Layer w10: U10.15 650,3010 730,2930 1305,2930 1410,2825 1410,2470 1665,2215 1780,2215 v1(1820,2175) ; P23.3 1044.73,1565.27 1044.73,1482.68 1030,1467.95 P20.3 ; v1(1682.05,2001.42) P1.18
SHIELD: P27.1 P28.1 | length 407.1
  Top Layer w10: P28.1 635,840 635,875 655,895 655,919.14 660.86,925 854.14,925 860,919.14 P27.1
TX: P1.1 P10.3 | length 1480.7
  Bottom Layer w10: P10.3 59.42,2901.42 205.06,2755.78 374.49,2755.78 390.31,2739.96 390.31,2712.53 507.83,2595 1310.63,2595 P1.1
UP-RX: P1.4 P14.1 | length 557.6
  Top Layer w10: P14.1 992.05,2296.42 1052.05,2356.42 1262.05,2356.42 P1.4
V_BATT: P2.2 P3.2 P19.1 P25.2 | length 2267.6
  Top Layer w15: 1770,3010 1866.42,3106.42 2362.05,3106.42 2518.23,2950.24 P19.1
  Top Layer w20: P2.2 1087.05,3366.42 1217.05,3366.42 1257.05,3326.42 1257.05,3061.42 1298.46,3020 1340,3020 P3.2 ; P25.2 1770,3010
  Top Layer w30: 1340,3020 1775,3020
VA: C8.2 C9.1 C12.1 U2.5 U3.5 | length 357.9
  Top Layer w8: C12.1@1756.3,821.57 U3.5
  Top Layer w10: U2.5 C8.2@1757.95,263.82 ; v1(1652.05,796.42) 1681.46,825.83 C12.1@1752.05,825.83 ; C8.2 1823.55,267.92 v1(1847.05,291.42)
VCC: P1.3.3V P9.1 P11.1 P20.1 P21.1 P22.1 P23.1 R3.1 R4.1 R5.1 R6.1 U10.2 | length 420
  Top Layer w10: R3.1 v1(1572.05,1701.42) ; R6.1 v1@1618.58,2102.95 ; v1(1622.05,2106.42) 1653.58,2137.95 R5.1 ; R4.1 v1@2190.51,1664.88
  Bottom Layer w10: v1(80,2985) 105,3010 U10.2
  other v1: 2192.05,1666.42
VCC1: C1.2 C2.1 P4.4 U1.5 | length 1003.4
  Top Layer w10: v1(2227.05,2001.42) 2235.16,2009.53 P4.4
  Bottom Layer w10: v1(2227.05,2001.42) 2308.58,2001.42 2392.24,1917.76 2490,1917.76 C1.2 ; C1.2@2494.09,1845.59 C2.1 U1.5@2555,1915.35
VCC2: C35.2 C37.1 P5.4 U9.5 | length 801.9
  Top Layer w10: v1(2237.05,1381.42) 2258.94,1359.53 P5.4
  Bottom Layer w10: v1(2237.05,1381.42) 2271.96,1346.5 C35.2 2450.91,1346.5 C37.1 2457.6,1353.19 U9.5
VCC3: C31.2 C33.1 P6.4 U8.5 | length 1422.7
  Top Layer w10: P6.4 145.16,2023.31 167.05,2001.42 v1(482.05,2001.42)
  Bottom Layer w10: U8.5 C33.1@291.81,2637.6 ; C33.1@293.5,2635.91 C31.2 245,2575 200,2530 200,2215 413.58,2001.42 v1(482.05,2001.42)
VCC4: C29.2 C30.1 P7.4 U7.5 | length 1612.5
  Top Layer w10: P7.4 -6.57,1376.42 v1(482.05,1376.42) ; v1(465,1705) 930,1705 v1(985,1760)
  Bottom Layer w10: v1@455,1705 438.58,1688.58 438.58,1376.42 v1(482.05,1376.42) ; U7.5@984.84,1860 C30.1 C29.2@1044.41,1790.91 ; v1(985,1760) 1015,1790 C29.2
VDDD: C7.1 C25.2 U3.30 U6.2 | length 290.8
  Top Layer w8: U3.30 1867.52,969.44
  Top Layer w10: U6.2 1706.85,1071.42 1746.23,1071.42 1749.99,1067.66 1763.27,1067.66 1772.96,1057.97 1772.96,1057.92 C25.2 1855.55,1057.92 1867.52,1045.94 1867.52,969.44
VDDIO: C16.1 C19.2 C20.1 U3.20 U5.5 | length 274.4
  Top Layer w8: U3.20@1995.79,821.26 2012.2,821.26 2063.55,769.92 C19.2
  Top Layer w10: C19.2@2132.95,764.02 U5.5
VEXT: C15.1 P12.2 R7.2 U4.1 | length 940.6
  Top Layer w10: P12.2 30,695 70.86,735.86 280.86,735.86 575,1030 575,1057.01 C15.1 U4.1@704.8,1057.01
VH: C13.2 C14.1 P16.1 P17.1 P26.1 U4.5 | length 1034.6
  Top Layer w10: U4.5 C14.1@853.86,1053.82 ; C14.1@862.05,1062.01 C13.2@926.14,1062.01 ; C13.2@927.05,1062.92 1207.08,1062.92 1270,1000 1270,941.42 ; P16.1 1270,890 1270,941.42 ; P17.1 1622.05,941.42 1270,941.42
VIN: C3.2 C4.1 C5.1 C10.1 C21.1 C26.1 C32.1 C34.1 C38.1 P1.Vin P2.3 P8.1 P10.6 R1.2 R7.1 U1.1 U2.1 U2.3 U5.1 U5.3 U6.3 U7.1 U8.1 U9.1 | length 16060.1
  Top Layer w10: -97.95,1055 -92.95,1060 405,1060 ; -97.95,2540 v1(130,2540) ; v1@475,1775 v1(890,1775) ; R7.1 405,1060 ; C5.1 C3.2@737.64,3160.51 ; C3.2 P8.1@892.05,3161.42 ; C10.1 U2.1@1552.99,262.01 ; 1522.2,156.42 U2.3 ; C26.1@1577.64,1036.42 1582.05,1036.42 U6.3 ; C26.1@1577.64,1041.42 1471.42,1041.42 1415,985 1350.53,985 1315.53,1020 1315.53,1029.47 1240,1105 450,1105 405,1060 ; P1.Vin 2083.46,2635 ; v1(2210,2075) 2210,2508.46 2083.46,2635 ; v1@2320,1680 2270,1730 2240,1730 2083.46,1886.54 2083.46,2635 ; U5.1 C21.1@2410.24,764.02 ; U5.3 2358.9,838.82 2369.8,849.72 2432.04,849.72 2440.83,840.94 2440.83,793.08 2413.58,765.83 C21.1
  Top Layer w20: P8.1@912.05,3181.42 P2.3 791.42,3291.42 740,3240 308.46,3240 307.05,3241.42 22.05,3241.42 P10.6 -97.95,3121.42 -97.95,2540 -97.95,1055 -97.95,-27.05 -40,-85 660,-85 766.42,21.42 1412.05,21.42 ; C10.1 1447.64,262.01 1412.05,226.42 1412.05,156.42 ; 1522.2,156.42 1412.05,156.42 ; U5.1 2349.29,519.29 2224.82,394.82 2019.82,394.82 1925,300 1925,95 1851.42,21.42 1412.05,21.42 ; 1412.05,21.42 1412.05,156.42
  Top Layer w30: P8.1@912.05,3181.42 912.05,3001.42 1002.05,2911.42 1308.58,2911.42 1385,2835 1883.46,2835 P1.Vin
  Bottom Layer w10: C34.1 84.41,2619.41 92.4,2627.4 92.4,2637.6 U8.1 v1@132.76,2542.76 ; v1(130,2540) 165,2505 165,2095 v1(480,1780) ; C32.1@838.19,1862.6 U7.1 v1@887.76,1777.24 ; v1(2210,2075) 2267.58,2017.42 2547.43,2017.42 U1.1 2552.6,2027.4 2529.41,2050.59 C4.1 ; v1(2325,1670) 2400.59,1594.41 C38.1 U9.1@2460,1519.65
VSENS: P1.A14 R1.1 R2.2 | length 716.4
  Top Layer w10: R1.1 R2.2 2046.54,1733.46 v1(2060,1720)
  Bottom Layer w10: P1.A14 1817.05,1467.95 1845,1440 2045,1440 2075,1470 2075,1705 v1(2060,1720) v1@2050,1730
pads on no net: J1. P1.3.3V2 P1.A10 P1.A11 P1.AGND P1.AREF P1.GND2 P1.PGM P1.VUSB P2.1 P4.0 P4.1 P4.8 P5.0 P5.1 P5.8 P6.0 P6.1 P6.8 P7.0 P7.1 P7.8 P8.2 P9.2 P10.1 P10.2 P13.3 P13.4 P14.3 P14.4 P15.3 P15.4 P19. P19.2 P19.3 P19.4 U3.2 U3.4 U3.6 U3.8 U3.9 U3.16 U3.17 U3.18 U3.19 U3.22 U3.28 U10.1 U10.4 U10.5 U10.6 U10.7 U10.8 U10.9 U10.10 U10.11 U10.12
copper on no net: | length 150
  Top Layer w20: 1372.05,1036.42 1372.05,1186.42

## Polygon pours and split planes (outlines as drawn)
DGND on Internal Plane 1 (split plane): 2836.95,1116.52 -122.86,1116.52 -122.86,3386.32 2836.95,3386.32
AGND on Internal Plane 1 (split plane): 2836.95,-123.49 -122.86,-123.49 -122.86,1106.32 2836.95,1106.32
VCC on Internal Plane 2 (split plane): 2836.95,1116.52 -122.86,1116.52 -122.86,3386.32 2836.95,3386.32
VA on Internal Plane 2 (split plane): 2836.95,-123.49 -122.86,-123.49 -122.86,1106.32 2836.95,1106.32

## Other copper
Internal Plane 1 (plane layer: these items are gaps in the copper):
  lines w10: -142.95,-143.58 2857.05,-143.58 2857.05,1106.42 2852.05,1111.42 -142.95,1111.42 -142.95,-143.58
Internal Plane 2 (plane layer: these items are gaps in the copper):
  lines w10: -142.95,-143.58 2857.05,-143.58 ; -142.95,-143.58 -142.95,-143.58 ; -142.95,-143.58 -142.95,1111.42 2857.05,1111.42 2857.05,-143.58 ; 2857.05,-143.58 2857.05,-143.58

## Silkscreen, mask and mechanical layers (free items; w line width, h text height)
Top Overlay:
  text "ON" at 705,3355 h200 r180
  text "V" at -80,3180 h80 r90
  text "G" at -75,3080 h80 r90
  text "Rx" at -75,2970 h80 r90
  text "Tx" at -80,2860 h80 r90
  text "EN" at 1370,2835 h200 r90
  text "-" at 1520,2815 h160
  text "-" at 1855,2815 h160
  text "+" at 1400,2785 h160
  text "+" at 1735,2785 h160
  text "DN" at 1495,2440 h200 r90
  text "UP" at 1492.05,2090 h200 r90
  text "3" at 560,2055 h200 r270
  text "1" at 2185,2015 h200 r90
  text "4" at 505,1370 h200 r270
  text "2" at 2190,1340 h200 r90
  text "Loggerhead" at 2665,995 h200 r270
  text "LS1/LS2" at 2490,985 h200 r270
  text "G" at 465,860 h60
  text "Sh" at 550,855 h60
  text "Hydro Bat" at -70,720 h60 r270
  text "GND" at 235,540 h60 r90
  text "+" at 0,445 h160
  text "G" at 1456.89,336.54 h60
  text "S" at 1566.89,336.54 h60
  text "V" at 1672.05,336.42 h60
  text "L" at 2100,275 h60 r90
  text "G" at 1057.05,256.42 h60
  text "S" at 1167.05,256.42 h60
  text "V" at 1277.05,256.42 h60
  text "v2.1" at 2495,255 h100 r270
  text "C" at 710,250 h60
  text "Sh" at 820,250 h60
  text "R" at 2100,170 h60 r90
  text "Gr" at 665,155 h60
  text "2" at 1062.05,146.42 h60
  text "3" at 1167.05,146.42 h60
  text "1" at 1272.05,146.42 h60
  text "Bl" at 830,145 h60
  text "LINE OUT" at 2030,60 h60 r90
  text "G" at 2100,60 h60 r90
  text "LEFT" at 1012.05,-88.58 h60
  text "RIGHT" at 1502.05,-98.58 h60
Bottom Overlay:
  text "+" at 952.05,3106.42 h200 r180
  text "-" at 1137.05,3096.42 h200 r180
  text "G" at 1220,2785 h60 r270
  text "0" at 1220,2690 h60 r270
  text "3V" at 2030,2630 h60 r90
  text "1" at 1220,2590 h60 r270
  text "23" at 2030,2530 h60 r90
  text "2" at 1220,2490 h60 r270
  text "-" at 130,2485 h200 r180
  text "22" at 2030,2420 h60 r90
  text "3" at 1220,2390 h60 r270
  text "21" at 2030,2325 h60 r90
  text "4" at 1220,2290 h60 r270
  text "20" at 2030,2225 h60 r90
  text "5" at 1220,2190 h60 r270
  text "19" at 2030,2135 h60 r90
  text "6" at 1220,2090 h60 r270
  text "18" at 2030,2030 h60 r90
  text "7" at 1220,1990 h60 r270
  text "17" at 2030,1930 h60 r90
  text "8" at 1220,1895 h60 r270
  text "16" at 2030,1825 h60 r90
  text "9" at 1220,1790 h60 r270
  text "15" at 2030,1730 h60 r90
  text "G" at 920,1630 h60 r270
  text "G" at 1075,1630 h60 r270
  text "G" at 1235,1630 h60 r270
  text "14" at 2030,1630 h60 r90
  text "D" at 920,1580 h60 r270
  text "D" at 1075,1580 h60 r270
  text "D" at 1235,1580 h60 r270
  text "13" at 2030,1530 h60 r90
  text "C" at 920,1525 h60 r270
  text "C" at 1075,1525 h60 r270
  text "C" at 1235,1525 h60 r270
  text "V" at 920,1475 h60 r270
  text "V" at 1075,1475 h60 r270
  text "V" at 1235,1475 h60 r270
  text "Vbat" at 1430,1430 h60 r90
  text "12" at 1340,1385 h60
  text "+" at 140,1345 h200 r180
  text "V" at 910,1260 h60 r180
  text "C" at 960,1260 h60 r180
  text "D" at 1015,1260 h60 r180
  text "G" at 1065,1260 h60 r180
  text "GND" at 195,540 h60 r270
  text "Hydro Bat" at -70,500 h60 r270
  text "+" at 0,445 h160
Mechanical 1:
  the board outline again, w10

## Text inside footprints (layer, text, board x,y; h text height)
C1: Bottom Overlay "+" at 2505,1865 h19.68 r270
C3: Top Overlay "+" at 762.05,3176.42 h19.68
C8: Top Overlay "+" at 1747.05,291.42 h19.68 r90
C13: Top Overlay "+" at 910,1095 h19.68 r90
C19: Top Overlay "+" at 2142.05,746.42 h19.68 r270
C25: Top Overlay "+" at 1812.05,1081.42 h19.68 r90
C29: Bottom Overlay "+" at 1020,1805 h19.68
C31: Bottom Overlay "+" at 270,2590 h19.68
C35: Bottom Overlay "+" at 2410,1370 h19.68 r270